# Altium PCB PCB2.PcbDoc
Units mm, origin at the board's own origin, x right, y up, seen from the top; angles counter-clockwise.
Board outline 152.4 x 101.6 mm, 2 copper layers (Top Layer, Bottom Layer); 14 components, 24 nets, 106 pads, 31 vias.
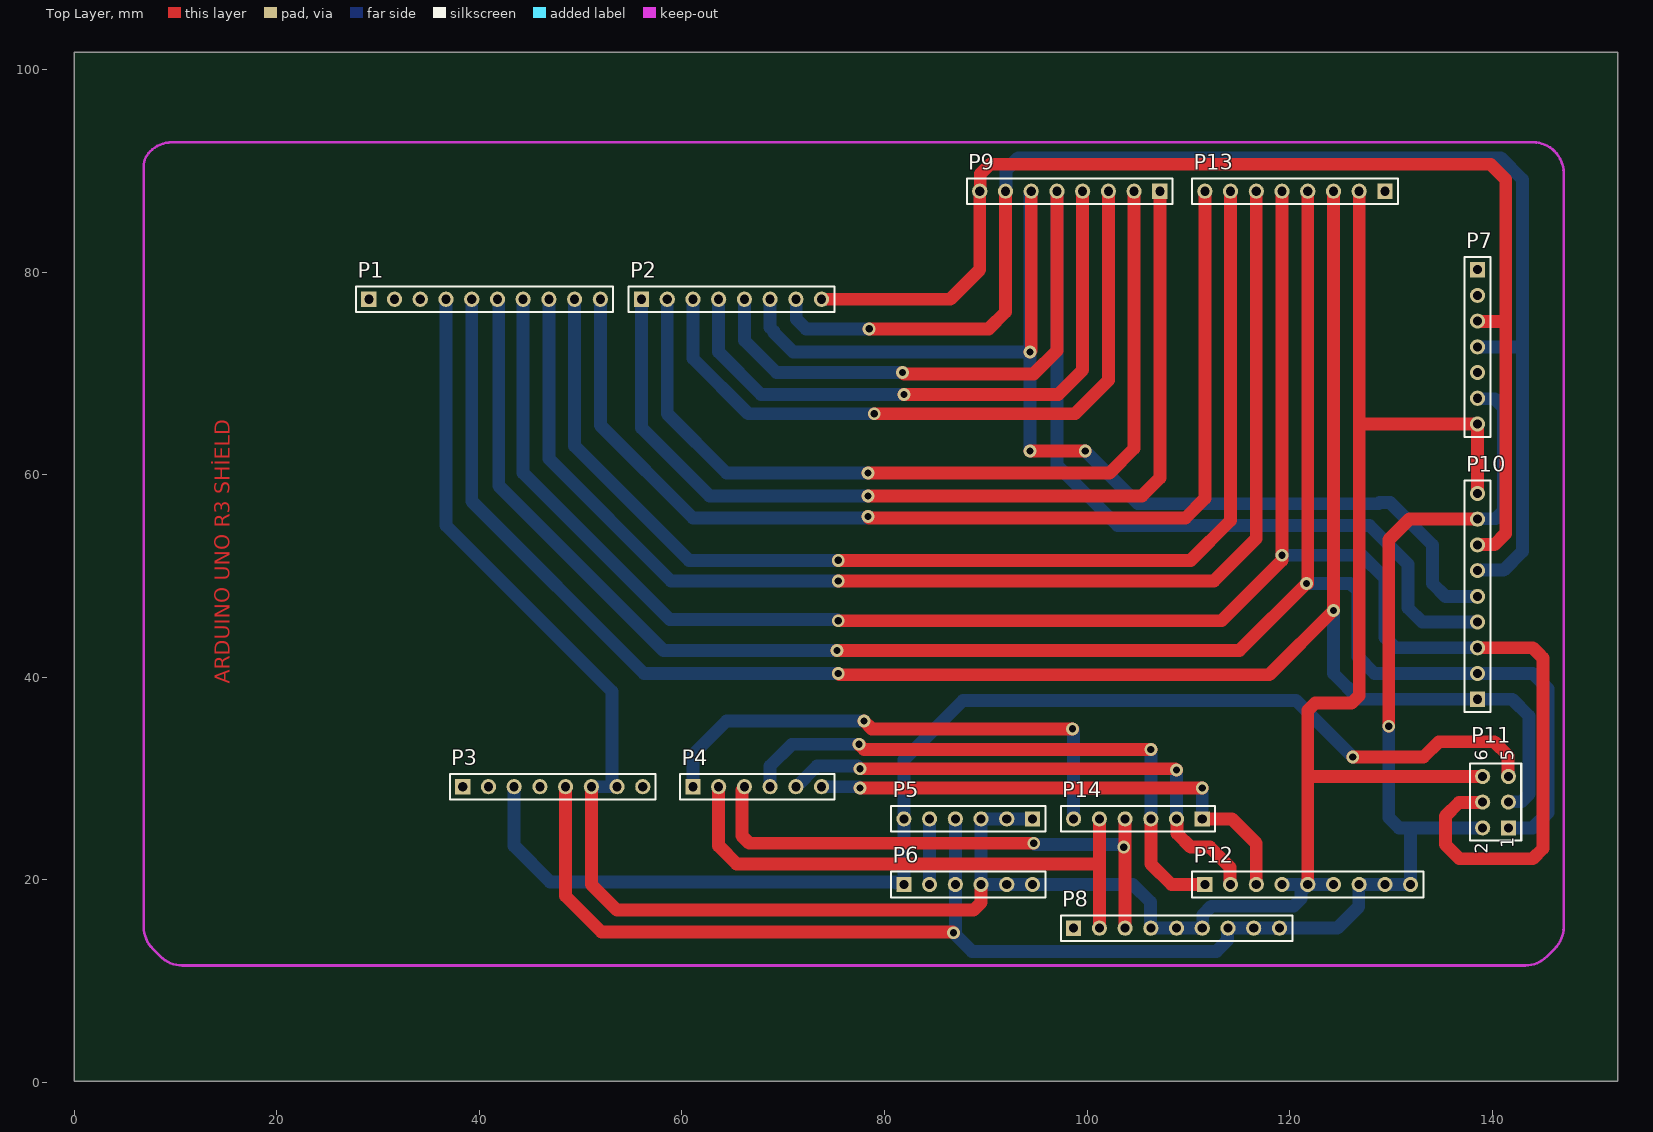
[diagram p0: Top Layer view]
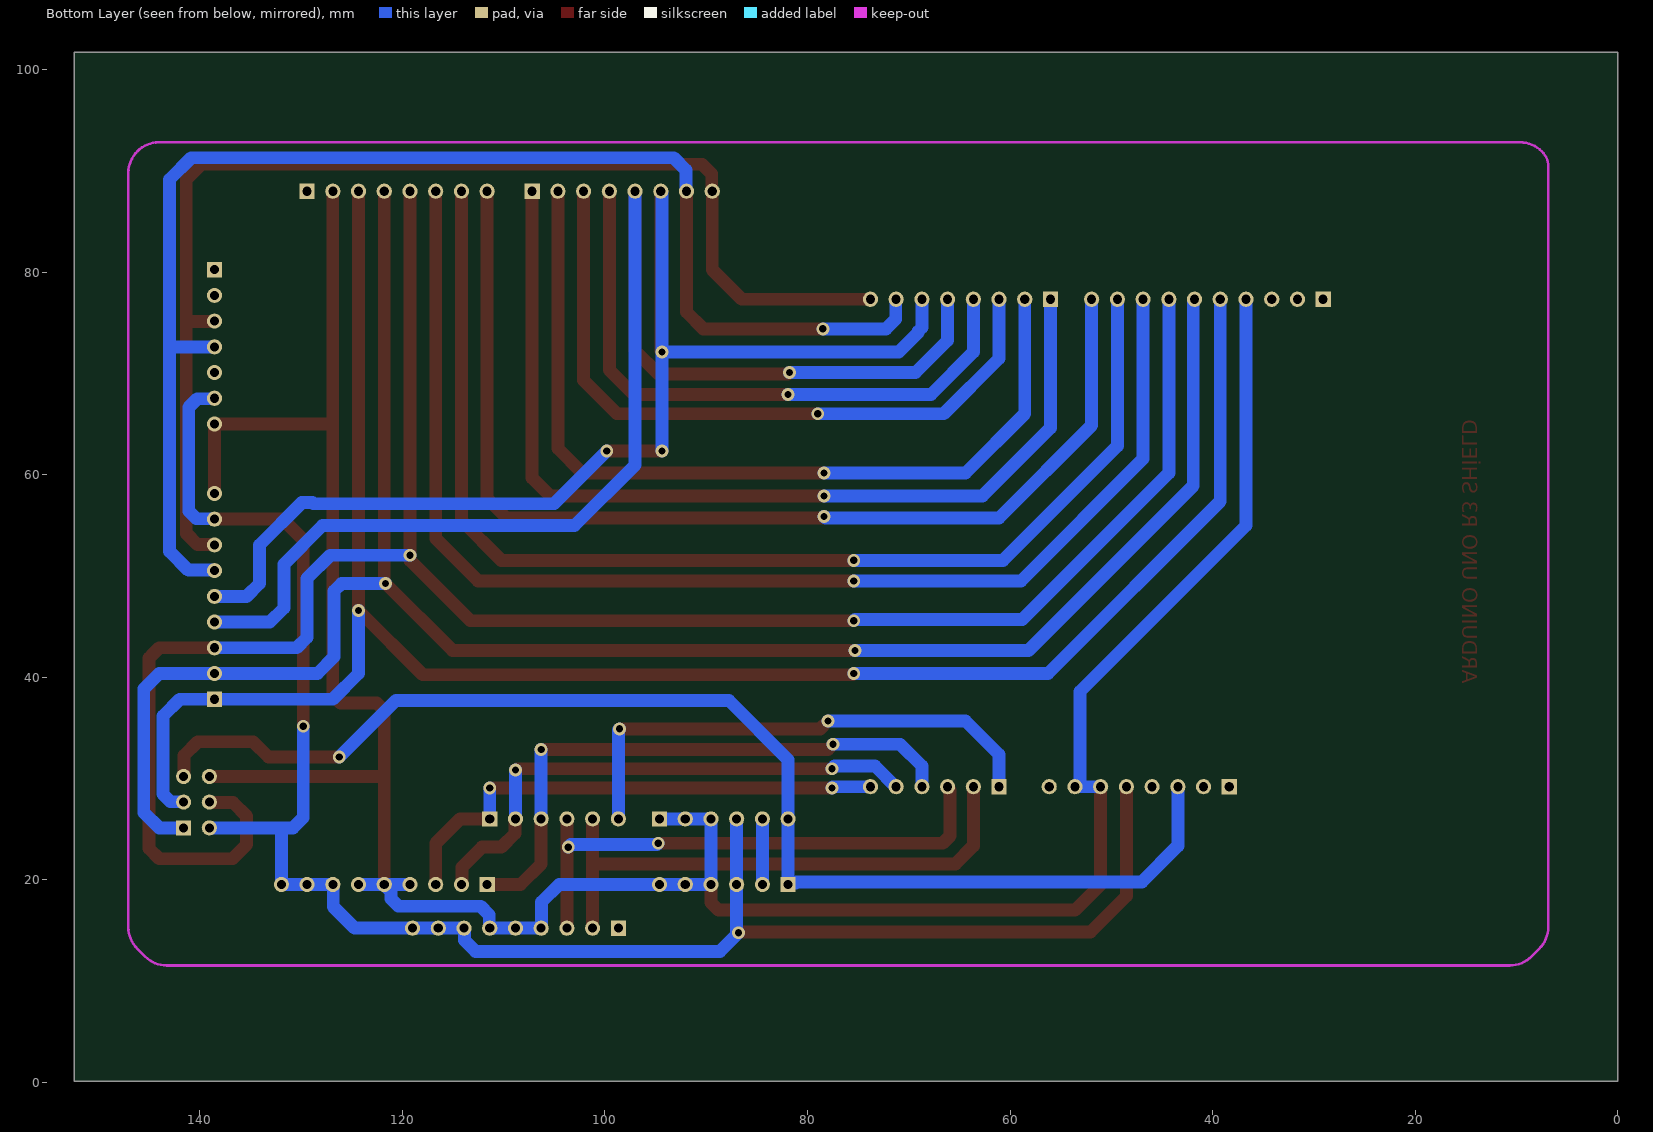
[diagram p1: Bottom Layer view, seen from below]

## Layer stack, top to bottom
Top Solder: solder mask 0.0102, Solder Resist, Dk 3.5
Top Layer: signal copper 0.0356
Dielectric 1: dielectric 0.32, FR-4, Dk 4.8
Bottom Layer: signal copper 0.0356
Bottom Solder: solder mask 0.0102, Solder Resist, Dk 3.5

## Board outline
0,0.127 152.4,0.127 152.4,101.727 0,101.727

## Design rules (kind name [scope] priority, off if disabled: settings)
Clearance [All] p1: gap=0.254 ignorepadtopadclearanceinfootprint=FALSE except(0: Arc-Hole Track-Hole SMDPad-Hole THPad-Hole Via-Hole Fill-Hole Poly-Hole Region-Hole Text-Hole)
PolygonConnect [All] p1: connectstyle=Relief reliefconductorwidth=0.254 reliefentries=4 polygonreliefangle="90 Angle" airgapwidth=0.254
RoutingVias [All] p1: holewidth=0.711 width=1.27 viastyle="Through Hole" minholewidth=0.711 minwidth=1.27 maxholewidth=0.711 maxwidth=1.27
SolderMaskExpansion [All] p1: expansion=0.102 istentingtop=FALSE
Width [All] p1: maxlimit=2.54 minlimit=0.254 preferedwidth=1.27
30 further rules are at their usual default settings.

## Components (designator, comment, footprint, x,y, rotation, side; value= is the part's Value field where it differs from the comment)
P1 "Header 10" HDR1X10 29.083,77.343 r0 top
P2 "Header 8" HDR1X8 56.007,77.343 r0 top
P3 "Header 8" HDR1X8 38.354,29.21 r0 top
P4 "Header 6" HDR1X6 61.087,29.21 r0 top
P5 "Header 6" HDR1X6 94.615,26.035 r180 top
P6 "Header 6" HDR1X6 81.915,19.558 r0 top
P7 "Header 7" HDR1X7 138.557,80.264 r270 top
P8 "Header 9" HDR1X9 98.679,15.24 r0 top
P9 "Header 8" HDR1X8 107.188,88.011 r180 top
P10 "Header 9" HDR1X9 138.557,37.846 r90 top
P11 "Header 3X2" HDR2X3 141.605,25.146 r90 top
P12 "Header 9" HDR1X9 111.633,19.558 r0 top
P13 "Header 8" HDR1X8 129.413,88.011 r180 top
P14 "Header 6" HDR1X6 111.379,26.035 r180 top

## Footprints (in the part's own frame and the unit in brackets; to place one, negate y for a bottom-side part, rotate by r counter-clockwise, add the part's x,y. Pads: shape width x height; smd on the part's side, far side on the other; paste and mask are expansions set on the pad)
HDR1X6 [mm] "Connector; Header; 6 Position"
  rect 1.5x1.5 hole 0.9: 1(0,0)
  round 1.5 hole 0.9: 2(2.54,0) 3(5.08,0) 4(7.62,0) 5(10.16,0) 6(12.7,0)
  silkscreen extent -1.27,-1.27 13.97,1.27
HDR1X7 [mm] "Connector; Header; 7 Position"
  rect 1.5x1.5 hole 0.9: 1(0,0)
  round 1.5 hole 0.9: 2(2.54,0) 3(5.08,0) 4(7.62,0) 5(10.16,0) 6(12.7,0) 7(15.24,0)
  silkscreen extent -1.27,-1.27 16.51,1.27
HDR1X8 [mm] "Connector; Header; 8 Position"
  rect 1.5x1.5 hole 0.9: 1(0,0)
  round 1.5 hole 0.9: 2(2.54,0) 3(5.08,0) 4(7.62,0) 5(10.16,0) 6(12.7,0) 7(15.24,0) 8(17.78,0)
  silkscreen extent -1.27,-1.27 19.05,1.27
HDR1X9 [mm] "Connector; Header; 9 Position"
  rect 1.5x1.5 hole 0.9: 1(0,0)
  round 1.5 hole 0.9: 2(2.54,0) 3(5.08,0) 4(7.62,0) 5(10.16,0) 6(12.7,0) 7(15.24,0) 8(17.78,0) 9(20.32,0)
  silkscreen extent -1.27,-1.27 21.59,1.27
HDR1X10 [mm] "Connector; Header; 10 Position"
  rect 1.5x1.5 hole 0.9: 1(0,0)
  round 1.5 hole 0.9: 2(2.54,0) 3(5.08,0) 4(7.62,0) 5(10.16,0) 6(12.7,0) 7(15.24,0) 8(17.78,0) 9(20.32,0) 10(22.86,0)
  silkscreen extent -1.27,-1.27 24.13,1.27
HDR2X3 [mm] "Connector; Header; 3x2 Position"
  rect 1.5x1.5 hole 0.9: 1(0,0)
  round 1.5 hole 0.9: 2(0,2.54) 3(2.54,0) 4(2.54,2.54) 5(5.08,0) 6(5.08,2.54)
  silkscreen extent -1.27,-1.27 6.35,3.81

## Part data
P1: "Header, 10-Pin", LatestRevisionDate=17-Jul-2002, LatestRevisionNote="Re-released for DXP Platform.", Publisher="Altium Limited"
P2 P3 P9 P13: "Header, 8-Pin", LatestRevisionDate=17-Jul-2002, LatestRevisionNote="Re-released for DXP Platform.", Publisher="Altium Limited"
P4 P5 P6 P14: "Header, 6-Pin", LatestRevisionDate=17-Jul-2002, LatestRevisionNote="Re-released for DXP Platform.", Publisher="Altium Limited"
P7: "Header, 7-Pin", LatestRevisionDate=17-Jul-2002, LatestRevisionNote="Re-released for DXP Platform.", Publisher="Altium Limited"
P8 P10 P12: "Header, 9-Pin", LatestRevisionDate=17-Jul-2002, LatestRevisionNote="Re-released for DXP Platform.", Publisher="Altium Limited"
P11: "Header, 3-Pin, Dual row", LatestRevisionDate=17-Jul-2002, LatestRevisionNote="Re-released for DXP Platform.", Publisher="Altium Limited"

## Via types
v1: diameter 1.27, hole 0.711, Top Layer to Bottom Layer, 31 vias

## Nets (pads, with @x,y where several pads share a name; then routed paths per layer and width w, separated by ;. In a path a pad name is that pad's centre, name@x,y a point inside that pad or via, vN(x,y) a via of type N, cw(c..) or ccw(c..) an arc to the next point about the centre after c; other vN are vias at no path point)
GND: P1.4 P3.6 P3.7 P5.1 P5.2 P5.3 P6.4 P6.5 P6.6 P7.7 P8.4 P8.5 P8.6 P10.9 P11.6 P12.4 P12.5 P12.6 P13.2 | length 272.6
  Top Layer w1.27: P3.6 51.054,19.558 53.594,17.018 88.791,17.018 89.535,17.762 P6.4 ; P12.5 121.793,30.226 ; P13.2 126.873,65.024 ; P10.9 P7.7 126.873,65.024 ; P11.6 121.793,30.226 ; 121.793,30.226 121.793,36.739 122.537,37.483 126.129,37.483 126.873,38.227 126.873,65.024
  Bottom Layer w1.27: P1.4 36.703,54.991 53.086,38.608 53.086,29.78 53.594,29.272 P3.7 53.086,29.21 P3.6 ; P5.1 P5.2 P5.3 P6.4 P6.5 P6.6 104.521,19.558 106.255,17.824 106.255,15.284 P8.4 P8.5 P8.6 111.423,15.284 111.423,16.554 112.268,17.399 120.396,17.399 121.14,18.143 121.14,18.843 121.793,19.496 P12.5 ; P12.4 P12.5 ; P12.6 P12.5
NetP1_5: P1.5 P10.1 P11.3 P13.3 | length 193.5
  Top Layer w1.27: v1(75.438,40.386) 75.565,40.259 117.983,40.259 v1(124.333,46.609) P13.3
  Bottom Layer w1.27: P1.5 39.243,57.404 56.261,40.386 v1(75.438,40.386) ; v1(124.333,46.609) 124.333,40.386 126.873,37.846 P10.1 141.986,37.846 143.637,36.195 143.637,28.474 142.893,27.73 141.649,27.73 P11.3
NetP1_6: P1.6 P10.2 P11.1 P13.4 | length 195.2
  Top Layer w1.27: v1(75.311,42.672) 115.062,42.672 v1(121.666,49.276) ; v1@121.793,49.276 P13.4
  Bottom Layer w1.27: P1.6 41.783,77.281 41.91,77.154 41.91,58.928 58.166,42.672 v1(75.311,42.672) ; v1(121.666,49.276) 126.002,49.276 126.746,48.532 126.746,42.037 128.397,40.386 P10.2 144.018,40.386 145.542,38.862 145.542,26.67 144.018,25.146 P11.1
NetP1_7: P1.7 P10.3 P11.4 P13.5 | length 207
  Top Layer w1.27: v1(75.438,45.593) 113.284,45.593 119.253,51.562 v1(119.253,52.07) P13.5 ; P10.3 144.018,42.926 144.652,42.292 145.034,41.91 145.034,23.114 144.018,22.098 136.779,22.098 135.382,23.495 135.382,26.289 136.735,27.642 139.021,27.642 P11.4
  Bottom Layer w1.27: P1.7 44.323,60.198 58.801,45.72 75.311,45.72 v1(75.438,45.593) ; v1(119.253,52.07) 127.127,52.07 129.413,49.784 129.413,43.942 130.429,42.926 P10.3
NetP1_8: P1.8 P13.6 | length 126.6
  Top Layer w1.27: v1(75.438,49.53) 112.522,49.53 116.713,53.721 P13.6
  Bottom Layer w1.27: P1.8 46.863,61.595 58.928,49.53 v1(75.438,49.53)
NetP1_9: P1.9 P13.7 | length 118.1
  Top Layer w1.27: v1(75.438,51.562) 110.236,51.562 114.173,55.499 P13.7
  Bottom Layer w1.27: P1.9 49.403,62.865 60.706,51.562 v1(75.438,51.562)
NetP1_10: P1.10 P13.8 | length 107.2
  Top Layer w1.27: v1(78.359,55.88) 78.486,55.753 109.728,55.753 111.633,57.658 P13.8
  Bottom Layer w1.27: P1.10 51.943,64.897 61.087,55.753 78.232,55.753 v1(78.359,55.88)
NetP2_1: P2.1 P9.1 | length 95.7
  Top Layer w1.27: v1(78.359,57.912) 105.41,57.912 107.188,59.69 P9.1
  Bottom Layer w1.27: P2.1 56.007,64.643 62.738,57.912 v1(78.359,57.912)
NetP2_2: P2.2 P9.2 | length 86.2
  Top Layer w1.27: v1(78.359,60.198) 102.235,60.198 104.648,62.611 P9.2
  Bottom Layer w1.27: P2.2 58.547,66.04 64.389,60.198 v1(78.359,60.198)
NetP2_3: P2.3 P9.3 | length 69.2
  Top Layer w1.27: v1(78.994,66.04) 98.806,66.04 102.108,69.342 P9.3
  Bottom Layer w1.27: P2.3 61.087,71.501 66.548,66.04 v1(78.994,66.04)
NetP2_4: P2.4 P9.4 | length 61.5
  Top Layer w1.27: v1(81.915,67.945) 97.155,67.945 99.568,70.358 P9.4
  Bottom Layer w1.27: P2.4 63.627,72.136 67.818,67.945 v1(81.915,67.945)
NetP2_5: P2.5 P9.5 P10.4 | length 130.5
  Top Layer w1.27: v1(81.788,70.104) 81.915,69.977 94.742,69.977 97.028,72.263 P9.5
  Bottom Layer w1.27: P2.5 66.167,73.279 69.342,70.104 v1(81.788,70.104) ; P9.5 97.028,60.96 102.997,54.991 127.889,54.991 131.699,51.181 131.699,46.863 133.096,45.466 P10.4
NetP2_6: P2.6 P9.6 P10.5 | length 123.6
  Top Layer w1.27: v1(94.361,62.357) v1(99.822,62.357) ; v1(94.361,72.136) 94.488,72.263 P9.6
  Bottom Layer w1.27: P2.6 68.707,74.549 69.088,74.168 69.088,74.041 70.105,73.024 70.739,72.39 70.993,72.136 v1(94.361,72.136) ; v1(94.361,62.357) v1(94.361,72.136) ; P9.6 94.488,87.949 94.361,87.822 v1(94.361,72.136) ; v1(99.822,62.357) 105.029,57.15 128.778,57.15 128.887,57.259 129.939,57.259 134.112,53.086 134.112,49.276 135.382,48.006 P10.5
NetP2_7: P2.7 P7.4 P9.7 P10.6 | length 136.6
  Top Layer w1.27: P2.7 P2.7@71.291,77.299 ; v1(78.486,74.422) 90.297,74.422 91.948,76.073 P9.7
  Bottom Layer w1.27: P2.7 71.291,77.299 71.291,75.394 72.263,74.422 v1(78.486,74.422) ; P9.7 91.992,88.055 91.992,90.087 93.218,91.313 140.843,91.313 143.002,89.154 143.002,72.644 ; P10.6 138.601,50.59 141.141,50.59 143.002,52.451 143.002,72.644 ; P7.4 143.002,72.644
NetP2_8: P2.8 P7.3 P9.8 P10.7 | length 120.2
  Top Layer w1.27: P2.8 86.487,77.343 89.408,80.264 P9.8 89.452,88.055 89.452,89.706 90.424,90.678 139.827,90.678 141.351,89.154 141.351,75.14 ; P10.7 138.601,53.13 140.252,53.13 141.351,54.229 141.351,75.14 ; P7.3 138.601,75.14 141.351,75.14
NetP3_3: P3.3 P5.6 P6.1 P11.5 | length 125.9
  Top Layer w1.27: v1(126.238,32.131) 133.223,32.131 134.747,33.655 140.208,33.655 141.561,32.302 141.561,30.27 P11.5
  Bottom Layer w1.27: P3.3 43.434,23.368 46.99,19.812 81.059,19.812 81.198,19.673 81.8,19.673 P6.1 P5.6 81.915,31.877 87.757,37.719 120.65,37.719 v1(126.238,32.131)
NetP3_5: P3.5 P5.4 P6.3 P7.6 P8.7 P8.8 P8.9 P10.8 P11.2 P12.7 P12.8 P12.9 | length 180.9
  Top Layer w1.27: P3.5 48.514,18.415 52.07,14.859 86.741,14.859 v1(86.804,14.795) ; v1(129.794,35.179) 129.794,53.594 131.826,55.626 P10.8
  Bottom Layer w1.27: P5.4 P6.3 86.995,14.986 v1(86.804,14.795) 88.646,12.954 112.776,12.954 113.875,14.053 113.875,15.196 P8.7 P8.8 P8.9 124.714,15.24 126.829,17.355 126.829,19.514 P12.7 P12.8 P12.9 131.953,25.019 132.08,25.146 ; v1(129.794,35.179) 129.794,26.162 130.81,25.146 132.08,25.146 ; P10.8 138.601,55.67 140.33,55.67 141.097,56.437 141.097,66.675 140.252,67.52 138.601,67.52 P7.6 ; P11.2 132.08,25.146
NetP4_1: P4.1 P14.6 | length 51.3
  Top Layer w1.27: v1(77.978,35.687) 78.74,34.925 v1(98.552,34.925)
  Bottom Layer w1.27: P4.1 61.087,32.385 64.389,35.687 v1(77.978,35.687) ; v1(98.552,34.925) 98.679,34.798 P14.6
NetP4_2: P4.2 P8.2 P14.5 | length 55
  Top Layer w1.27: P4.2 63.627,23.368 65.405,21.59 101.219,21.59 ; P8.2 101.219,21.59 ; P14.5 101.219,21.59
NetP4_3: P4.3 P8.3 P14.4 | length 53.9
  Top Layer w1.27: P4.3 66.167,29.148 65.913,28.894 65.913,24.366 66.657,23.622 v1(94.742,23.622) ; P8.3 P14.4
  Bottom Layer w1.27: v1(94.742,23.622) 94.869,23.495 103.378,23.495 v1(103.632,23.241)
NetP4_4: P4.4 P12.1 P14.3 | length 58.2
  Top Layer w1.27: v1(77.47,33.401) 77.978,32.893 v1(106.299,32.893) ; P14.3 106.299,21.59 108.331,19.558 P12.1
  Bottom Layer w1.27: P4.4 68.707,31.242 70.866,33.401 v1(77.47,33.401) ; P14.3 v1(106.299,32.893)
NetP4_5: P4.5 P12.2 P14.2 | length 53.3
  Top Layer w1.27: P4.5 P4.5@71.309,29.21 ; v1(77.597,30.988) 108.712,30.988 v1(108.839,30.861) ; P14.2 108.883,25.991 108.883,24.594 110.236,23.241 112.141,23.241 114.129,21.253 114.129,19.602 P12.2
  Bottom Layer w1.27: P4.5 71.309,29.21 73.341,31.242 77.343,31.242 v1(77.597,30.988) ; P14.2 v1(108.839,30.861)
NetP4_6: P4.6 P12.3 P14.1 | length 51.1
  Top Layer w1.27: v1(77.597,29.083) v1(111.379,29.083) ; P14.1 114.3,26.035 114.68,25.655 116.713,23.622 P12.3
  Bottom Layer w1.27: P4.6 77.47,29.21 v1(77.597,29.083) ; P14.1 v1(111.379,29.083)
NetP5_5: P5.5 P6.2 | length 6.5
  Bottom Layer w1.27: P6.2 P5.5
pads on no net: P1.1 P1.2 P1.3 P3.1 P3.2 P3.4 P3.8 P7.1 P7.2 P7.5 P8.1 P13.1

## Keep-outs
Keep-Out Layer:
  lines w0.254: 6.858,82.677 6.858,90.428 cw(c8.995,90.428) 7.484,91.939 cw(c9.652,89.771) 9.652,92.837 144.044,92.837 cw(c144.044,89.833) 146.168,91.957 cw(c144,89.789) 147.066,89.789 147.066,15.367 cw(c144,15.367) 146.168,13.199 145.424,12.455 cw(c143.256,14.623) 143.256,11.557 10.668,11.557 cw(c10.668,14.623) 8.5,12.455 7.756,13.199 cw(c9.924,15.367) 6.858,15.367 6.858,82.931

## Other copper
Top Layer:
  text "ARDUINO UNO R3 SHİELD" at 15.845,39.37 h2.5 r90
Multi-Layer:
  text "FURKAN YARDIMCI" at 12.573,85.416 h6

## Silkscreen, mask and mechanical layers (free items; w line width, h text height)
Mechanical 1:
  circle w0.013: c29.085,77.388 r0.254
  circle w0.013: c31.625,77.388 r0.254
  circle w0.013: c34.165,77.388 r0.254
  circle w0.013: c36.705,77.388 r0.254
  circle w0.013: c39.245,77.388 r0.254
  circle w0.013: c41.785,77.388 r0.254
  circle w0.013: c44.325,77.388 r0.254
  circle w0.013: c46.865,77.388 r0.254
  circle w0.013: c49.405,77.388 r0.254
  circle w0.013: c51.945,77.388 r0.254
  circle w0.013: c55.979,77.388 r0.254
  circle w0.013: c58.519,77.388 r0.254
  circle w0.013: c61.059,77.388 r0.254
  circle w0.013: c63.599,77.388 r0.254
  circle w0.013: c66.139,77.388 r0.254
  circle w0.013: c68.679,77.388 r0.254
  circle w0.013: c71.219,77.388 r0.254
  circle w0.013: c73.759,77.388 r0.254
  circle w0.013: c38.199,29.128 r0.254
  circle w0.013: c40.739,29.128 r0.254
  circle w0.013: c43.279,29.128 r0.254
  circle w0.013: c45.819,29.128 r0.254
  circle w0.013: c48.359,29.128 r0.254
  circle w0.013: c50.899,29.128 r0.254
  circle w0.013: c53.439,29.128 r0.254
  circle w0.013: c55.979,29.128 r0.254
  circle w0.013: c61.059,29.128 r0.254
  circle w0.013: c63.599,29.128 r0.254
  circle w0.013: c66.139,29.128 r0.254
  circle w0.013: c68.679,29.128 r0.254
  circle w0.013: c71.219,29.128 r0.254
  circle w0.013: c73.759,29.128 r0.254
  circle w0.013: c24.229,29.128 r1.587
  circle w0.013: c76.329,34.208 r1.587
  circle w0.013: c76.329,62.148 r1.587
  circle w0.013: c25.529,77.388 r1.587
  lines w0.013: 10.259,26.588 10.259,79.966 74.765,79.966 76.329,78.402 76.329,66.974 78.809,64.434 78.809,31.668 76.329,29.128 76.329,26.588 10.259,26.588

## Text inside footprints (layer, text, board x,y; h text height)
P11: Top Overlay "1" at 142.113,23.114 h1.27 r90; Top Overlay "2" at 139.573,22.606 h1.27 r90; Top Overlay "5" at 142.113,31.75 h1.27 r90; Top Overlay "6" at 139.573,31.75 h1.27 r90